# EAGLE board MusicBoard (EAGLE 7.4.0)
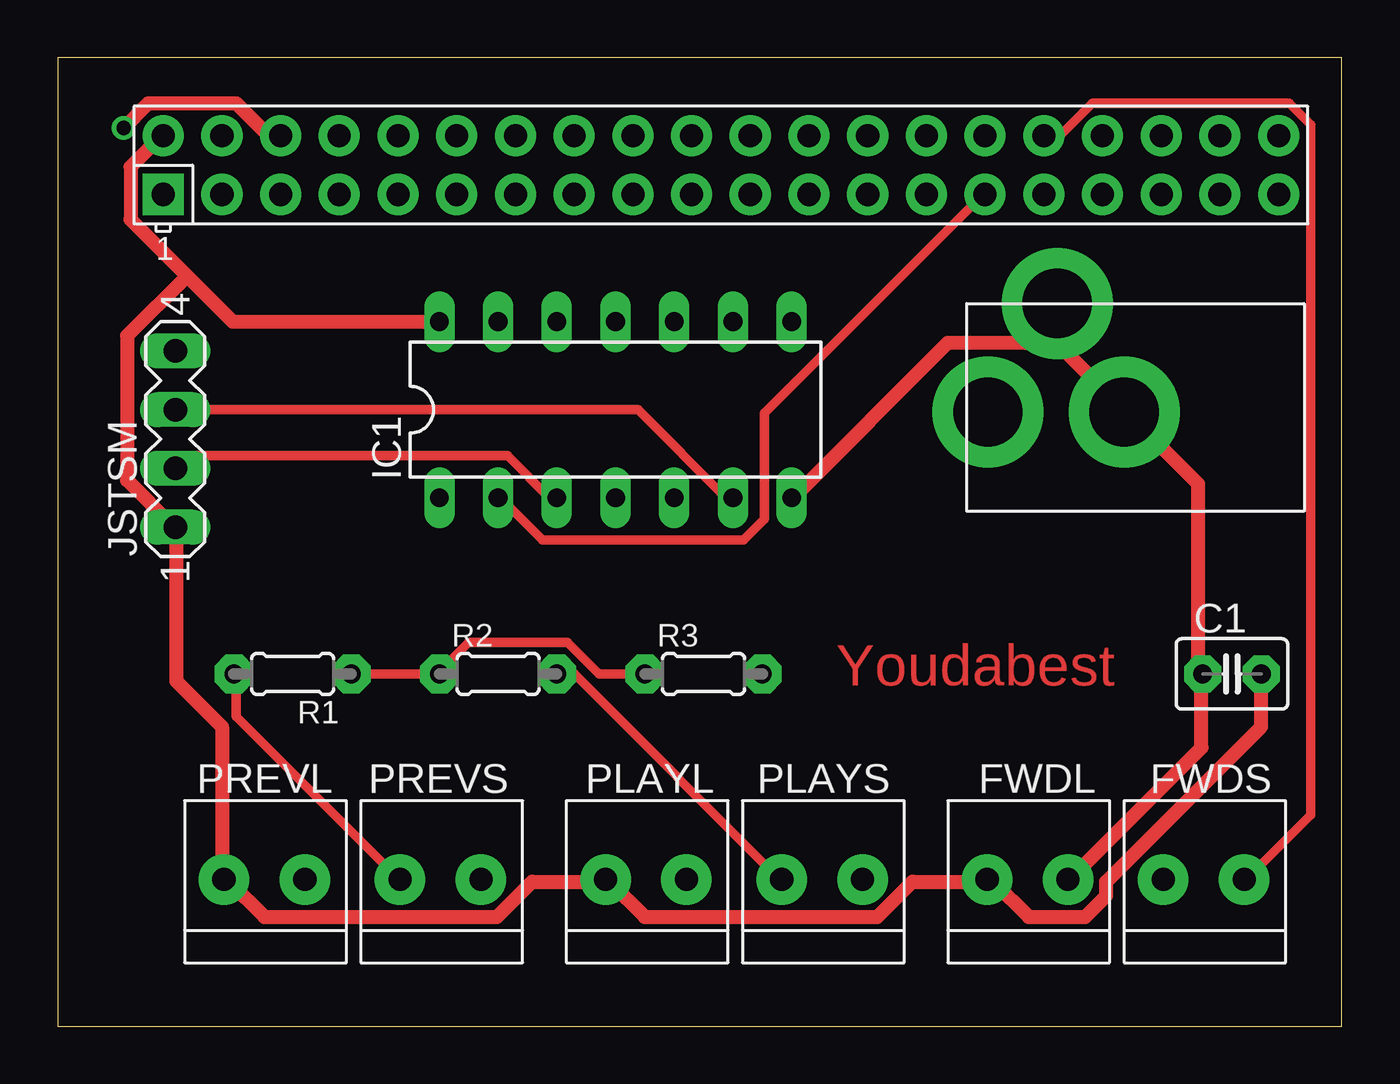
[diagram p0: board, top side]
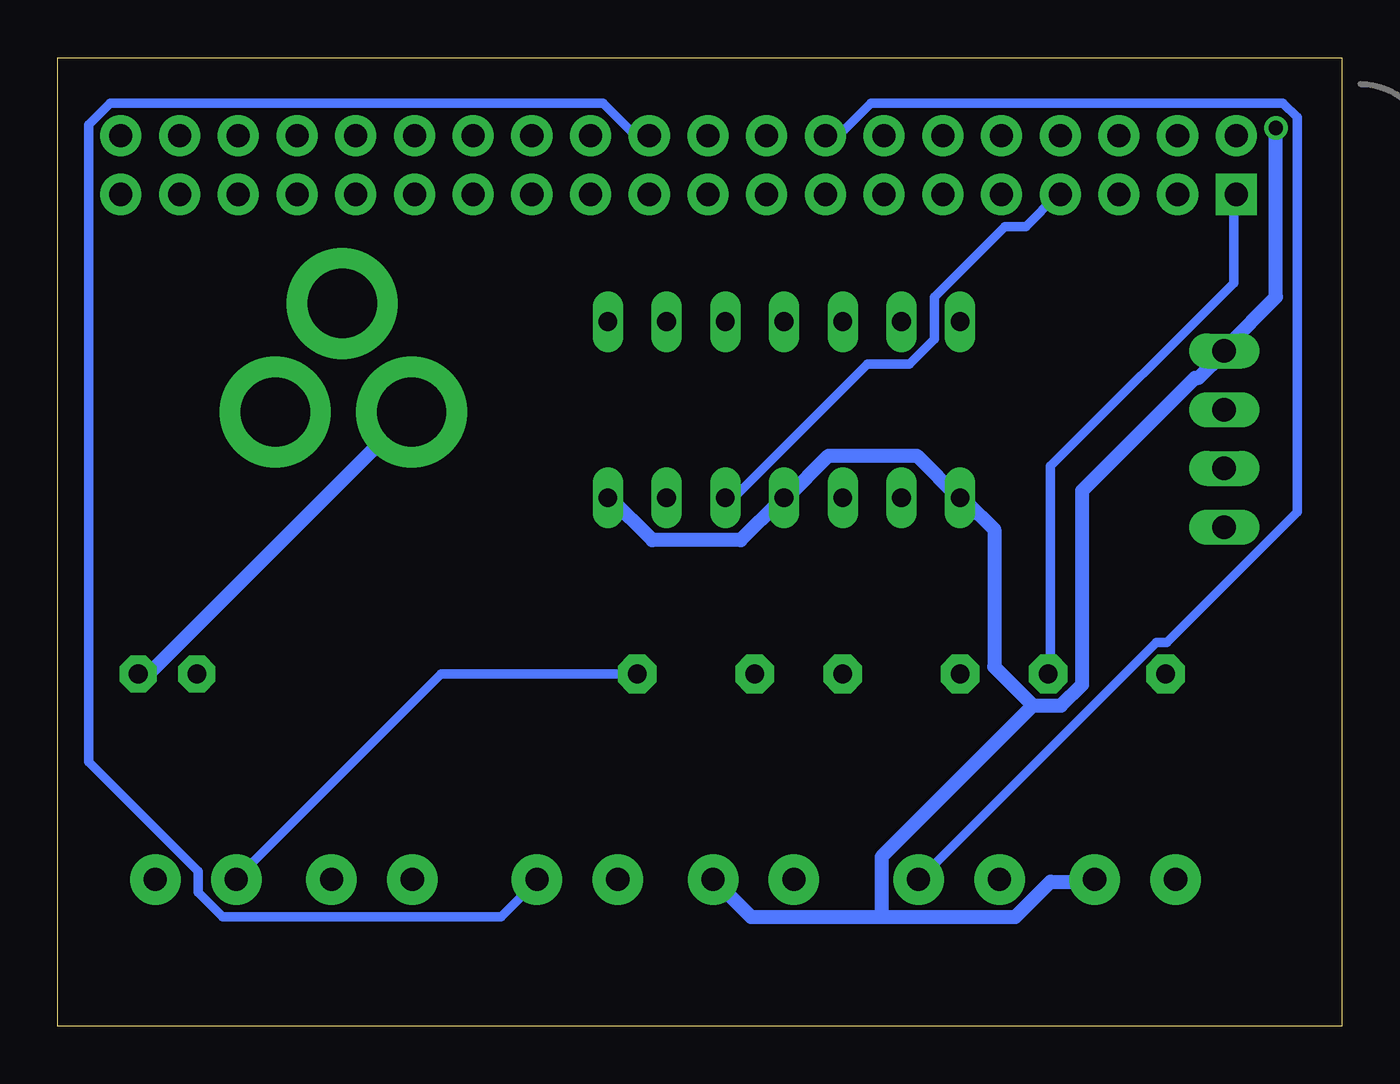
[diagram p1: board, bottom side, seen from below]

Size 55.55 x 41.9 mm. Coordinates in mm from the lower left corner, seen from the top.
Outline: 0,0 55.55,0 55.55,41.9 0,41.9 0,0
Copper layers (1*16): Top 0.035mm / dielectric 1.5mm / Bottom 0.035mm
Design rules "default": minimum track width 10mil, minimum drill 24mil, track to track 8mil, track to pad 8mil, pad to pad 8mil, via to via 8mil, smd to smd 8mil, copper to edge 40mil, drill to drill 8mil, minimum pad ring 10mil, minimum via ring 8mil, stop-mask expansion 4mil, vias tented up to drill 0mil, thermal gap 10mil
Net classes: 0 default: width 0.406 mm; 1 GND: width 0.61 mm; 2 PWR: width 0.61 mm

## Footprints (pad centres in the part's own frame; a part is rotated, then mirrored left to right if it is on the bottom)
C2.5-3 = drill 0.813 pad 1.6 octagon: 1 -1.27,0; 2 1.27,0
1X2-3.5MM = drill 1 pad 2.184: 1 1.8,0; 2 -1.7,0
DIL14 = drill 0.813 long: 1 -7.62,-3.81; 2 -5.08,-3.81; 3 -2.54,-3.81; 4 0,-3.81; 5 2.54,-3.81; 6 5.08,-3.81; 7 7.62,-3.81; 8 7.62,3.81; 9 5.08,3.81; 10 2.54,3.81; 11 0,3.81; 12 -2.54,3.81; 13 -5.08,3.81; 14 -7.62,3.81
MA04-1 = drill 1.016 long: 1 -3.81,0; 2 -1.27,0; 3 1.27,0; 4 3.81,0
PJ-102A = drill 3 pad 4.8: RING 0.1,-3.39; RING_SW -4.6,-6.29; TIP 0.1,-9.29
0204/5 = drill 0.813 pad 1.676 octagon: 1 -2.54,0; 2 2.54,0
RASPI_BOARD_B+_EDGES_0DRILL = drill 1 pad 1.778 square: 1 8.37,51.23 | drill 1 pad 1.778: 2 8.37,53.77; 3 10.91,51.23; 4 10.91,53.77; 5 13.45,51.23; 6 13.45,53.77; 7 15.99,51.23; 8 15.99,53.77; 9 18.53,51.23; 10 18.53,53.77; 11 21.07,51.23; 12 21.07,53.77; 13 23.61,51.23; 14 23.61,53.77; 15 26.15,51.23; 16 26.15,53.77; 17 28.69,51.23; 18 28.69,53.77; 19 31.23,51.23; 20 31.23,53.77; 21 33.77,51.23; 22 33.77,53.77; 23 36.31,51.23; 24 36.31,53.77; 25 38.85,51.23; 26 38.85,53.77; 27 41.39,51.23; 28 41.39,53.77; 29 43.93,51.23; 30 43.93,53.77; 31 46.47,51.23; 32 46.47,53.77; 33 49.01,51.23; 34 49.01,53.77; 35 51.55,51.23; 36 51.55,53.77; 37 54.09,51.23; 38 54.09,53.77; 39 56.63,51.23; 40 56.63,53.77

## Placement (x,y rotation side)
C1  .1 uF  [C2.5-3]  50.8,15.24 0 top
FWDL  1X2-3.5MM  [1X2-3.5MM]  41.91,6.35 0 top
FWDS  1X2-3.5MM  [1X2-3.5MM]  49.53,6.35 0 top
IC1  74125N  [DIL14]  24.13,26.67 0 top
JSTSM  [MA04-1]  5.08,25.4 90 top
PLAYL  1X2-3.5MM  [1X2-3.5MM]  25.4,6.35 0 top
PLAYS  1X2-3.5MM  [1X2-3.5MM]  33.02,6.35 0 top
POWER  2.1MMJACKTHM  [PJ-102A]  49.53,26.67 270 top
PREVL  1X2-3.5MM  [1X2-3.5MM]  8.89,6.35 0 top
PREVS  1X2-3.5MM  [1X2-3.5MM]  16.51,6.35 0 top
R1  1000ohm  [0204/5]  10.16,15.24 180 top
R2  1000ohm  [0204/5]  19.05,15.24 0 top
R3  1000ohm  [0204/5]  27.94,15.24 0 top
X1  RASPI_BOARD_B+_E0  [RASPI_BOARD_B+_EDGES_0DRILL]  -3.81,-15.24 0 top

## Library data of the parts
C1 = capacitor-wima
FWDL FWDS PLAYL PLAYS POWER PREVL PREVS R1-R3 = adafruit
IC1 = 74xx-us
JSTSM = con-lstb; OC_FARNELL: unknown; OC_NEWARK: unknown
X1 = raspberrypi_bastelstube_v13

## Nets
CIN: IC1.5 X1.7
COUT: IC1.6 JSTSM.3
DIN: IC1.2 X1.29
DOUT: IC1.3 JSTSM.2
GND [GND]: C1.1 FWDL.1 IC1.1 IC1.4 IC1.7 JSTSM.4 PLAYL.1 POWER.RING POWER.RING_SW PREVL.1 X1.6
N$1: PREVS.2 R1.2
N$2: PLAYS.2 R2.2
N$3: FWDS.2 R3.2
PWR [PWR]: C1.2 FWDL.2 IC1.14 JSTSM.1 PLAYL.2 POWER.TIP PREVL.2 X1.2
PWRSWITCH: R1.1 R2.1 R3.1 X1.1
SWITCH_FWD: FWDS.1 X1.32
SWITCH_PLAY: PLAYS.1 X1.22
SWITCH_PREV: PREVS.1 X1.16

## Tracks (layer width: path | path; a pad name or v marks a point on that pad's centre or on a via)
CIN
  Bottom 0.406: IC1.5 26.31,22.86 20.52,28.65 18.69,28.65 17.63,29.72 17.63,31.55 14.58,34.59 13.67,34.59 12.29,35.97 X1.7
COUT
  Top 0.406: IC1.6 28.91,22.86 25.09,26.67 JSTSM.3
DIN
  Top 0.406: IC1.2 19.15,22.86 20.98,21.03 29.67,21.03 30.58,21.95 30.58,26.52 40.03,35.97 X1.29
DOUT
  Top 0.406: IC1.3 21.28,22.86 19.46,24.69 5.59,24.69 5.13,24.23 JSTSM.2
GND  (via drill 0.61)
  Top 0.61: FWDL.1 43.84,6.4 49.48,12.04 49.48,15.24 C1.1 49.33,15.39 49.33,23.47 46.28,26.52 POWER.RING 45.97,26.82 43.38,29.41 43.38,31.24 POWER.RING_SW 43.23,29.57 38.51,29.57 31.8,22.86 IC1.7 | v2.84,38.86 3.91,39.93 7.72,39.93 9.09,38.56 9.55,38.56 X1.6
  Bottom 0.61: 19.91,4.72 25.55,4.72 27.08,6.25 PLAYL.1 | 19.91,4.72 14.12,4.72 12.6,6.25 10.77,6.25 PREVL.1 | IC1.7 31.65,22.86 29.82,21.03 26.01,21.03 24.33,22.71 IC1.4 24.03,22.86 22.2,24.69 18.39,24.69 16.56,22.86 IC1.1 16.26,22.71 15.04,21.49 15.04,15.55 13.36,13.87 | 13.36,13.87 12.14,13.87 11.23,14.78 11.23,23.16 6.35,28.04 6.2,28.04 5.13,29.11 JSTSM.4 4.98,29.41 2.84,31.55 v2.84,38.86 | 19.91,4.72 19.91,7.31 13.36,13.87
N$1
  Top 0.406: R1.2 7.72,15.24 7.72,13.41 14.73,6.4 PREVS.2
N$2
  Top 0.406: R2.2 22.35,15.24 31.19,6.4 PLAYS.2
N$3
  Bottom 0.406: R3.2 38.96,15.24 47.8,6.4 FWDS.2
PWR
  Top 0.61: IC1.14 7.57,30.48 5.59,32.46 | 5.59,32.46 3.15,34.9 3.15,37.19 4.52,38.56 X1.2 | 5.59,32.46 3,29.87 3,23.62 4.98,21.64 JSTSM.1 5.13,21.34 5.13,14.93 7.11,12.95 7.11,6.4 PREVL.2 7.42,6.25 8.94,4.72 19,4.72 20.52,6.25 23.57,6.25 PLAYL.2 23.88,6.25 25.4,4.72 35.46,4.72 36.98,6.25 40.18,6.25 FWDL.2 40.49,6.25 42.01,4.72 44.45,4.72 45.36,5.64 45.36,6.25 52.07,12.95 C1.2
  Bottom 0.61: C1.2 51.61,15.24 40.34,26.52 POWER.TIP
PWRSWITCH
  Top 0.406: R1.1 R2.1 16.56,15.39 17.78,16.61 22.05,16.61 23.42,15.24 R3.1
  Bottom 0.406: X1.1 4.67,35.97 4.67,32.16 12.6,24.23 12.6,15.24 R1.1
SWITCH_FWD
  Top 0.406: X1.32 42.77,38.56 43.38,38.56 44.76,39.93 53.29,39.93 54.2,39.01 54.2,9.14 51.46,6.4 FWDS.1
SWITCH_PLAY
  Bottom 0.406: X1.22 29.97,38.56 30.58,38.56 31.95,39.93 53.29,39.93 54.2,39.01 54.2,11.43 49.48,6.71 49.48,5.79 48.41,4.72 36.37,4.72 34.85,6.25 PLAYS.1
SWITCH_PREV
  Bottom 0.406: X1.16 22.2,38.56 21.74,38.56 20.37,39.93 2.54,39.93 1.93,39.32 1.93,22.25 7.57,16.61 8.03,16.61 18.24,6.4 PREVS.1

## Text on the board
Top: Youdabest